# Altium PCB 175-00032, rev1 4-Chan Current Driver.PcbDoc (part 1 of 2)
Units mil, origin at the board's own origin, x right, y up, seen from the top; angles counter-clockwise.
Board outline 3307.09 x 1515.75 mil, 6 copper layers (Top Layer  (*GTL), Mid-Layer 1 (*G1), Internal Plane 1 (*.GP1), InternalPlane2 (*GP2), InternalPlane3 (*.GP3), Bottom Layer  (*GBL)); 61 components, 44 nets, 304 pads, 99 vias.
Unrouted connection lines stored in the file: 1.
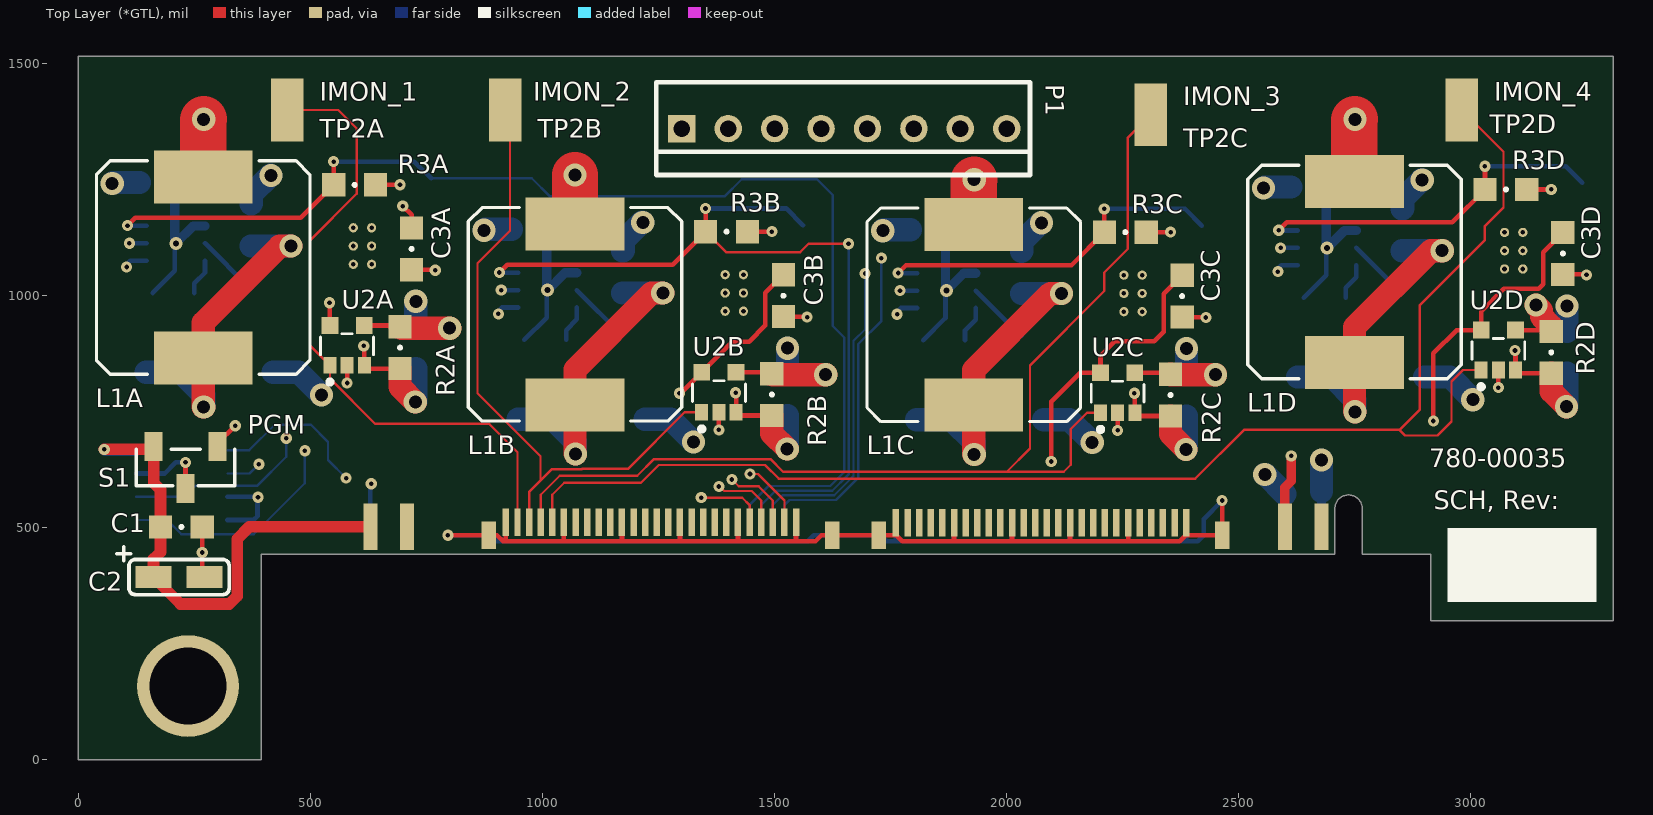
[diagram p0: Top Layer  (*GTL) view]
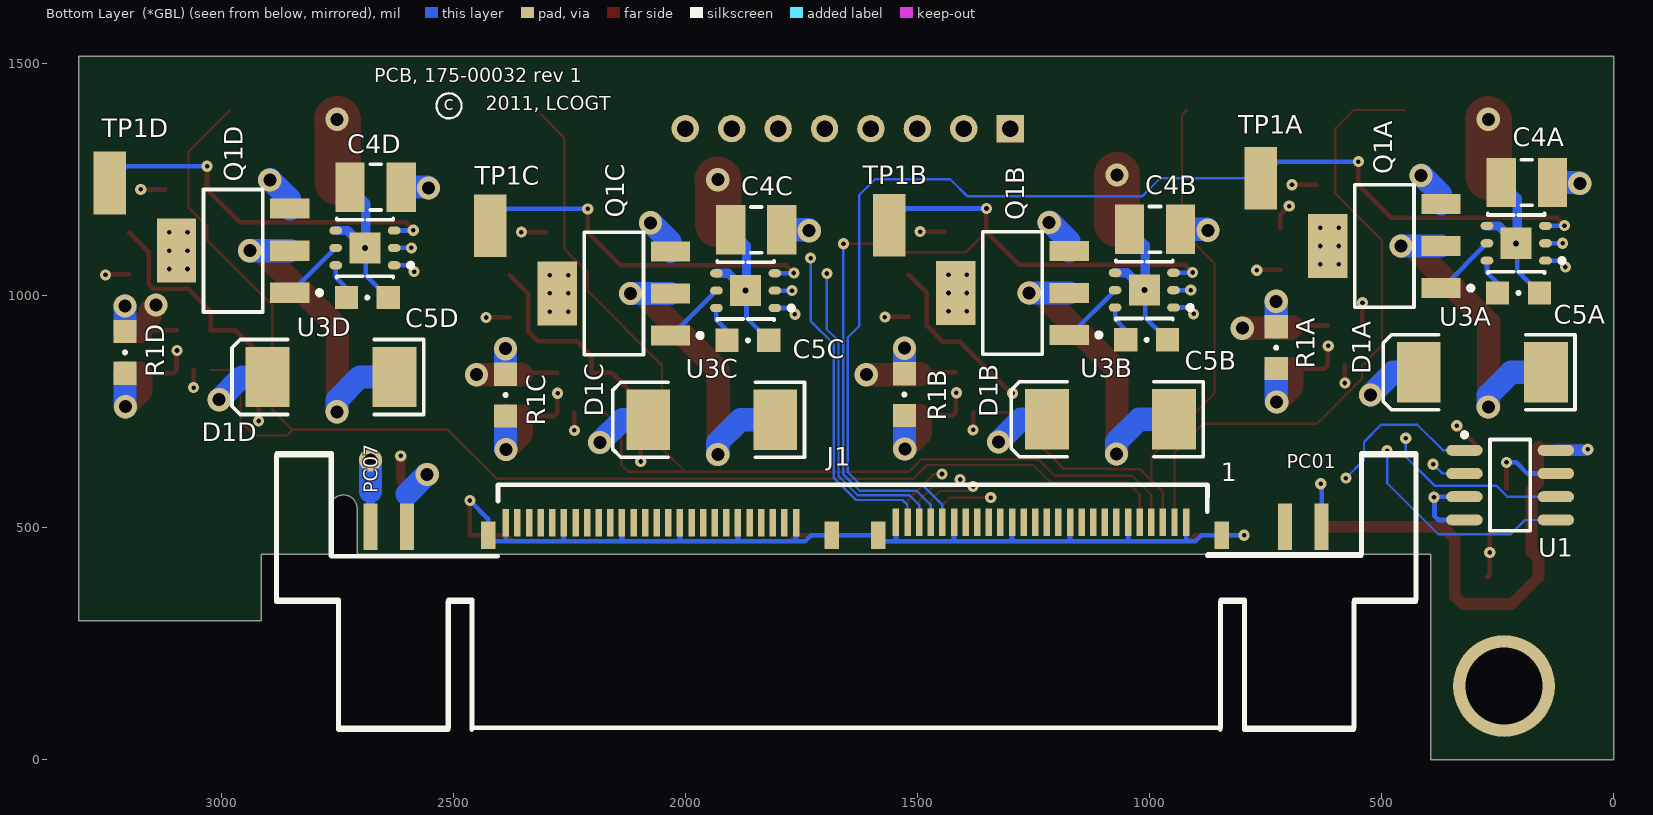
[diagram p1: Bottom Layer  (*GBL) view, seen from below]
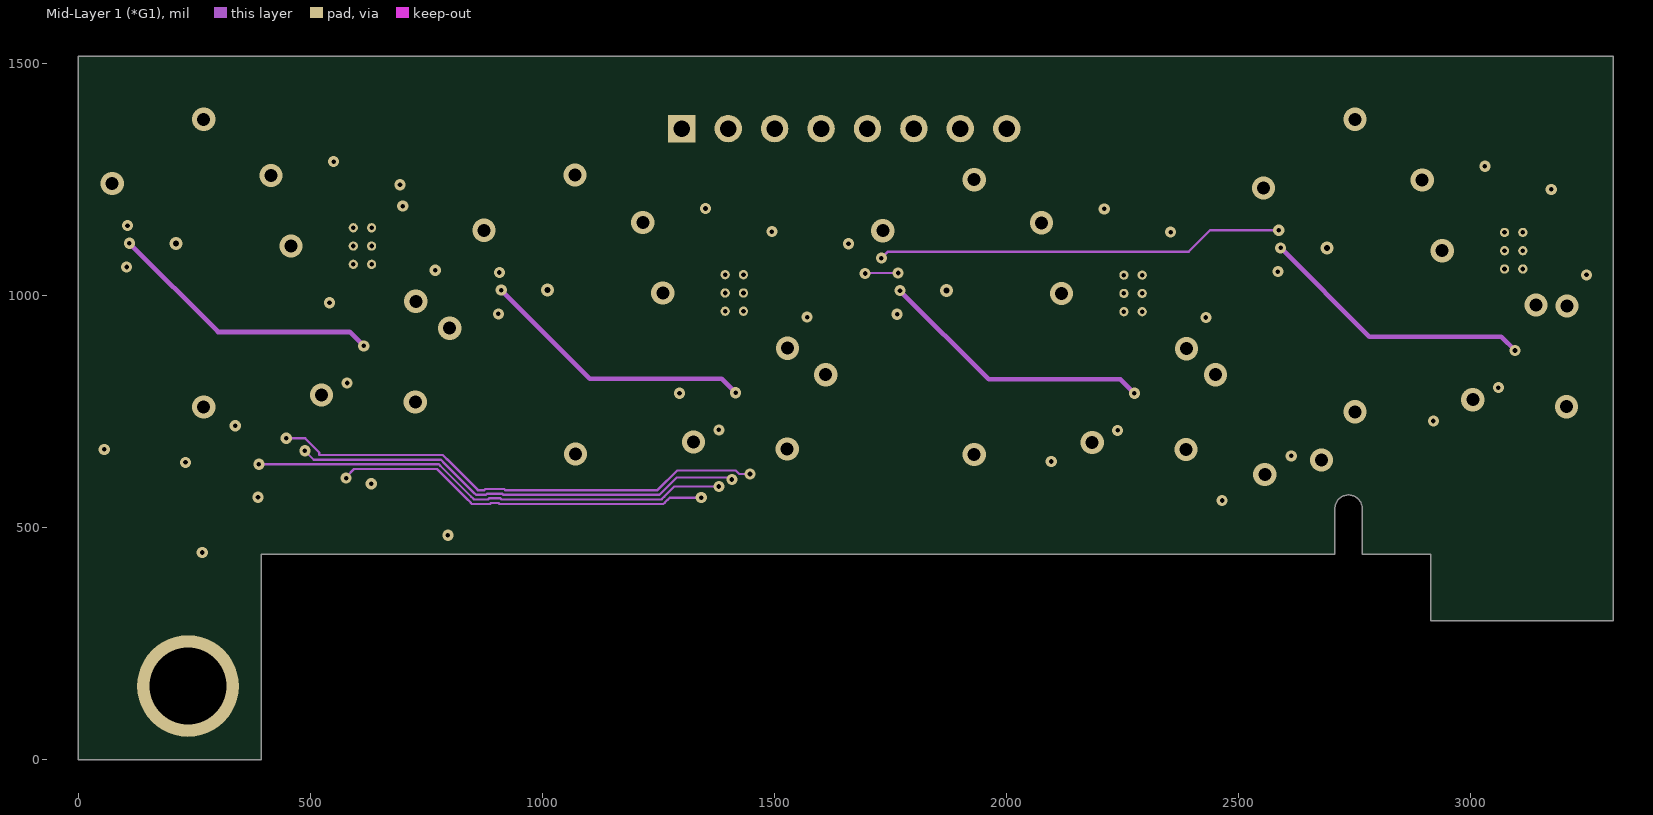
[diagram p2: Mid-Layer 1 (*G1)]
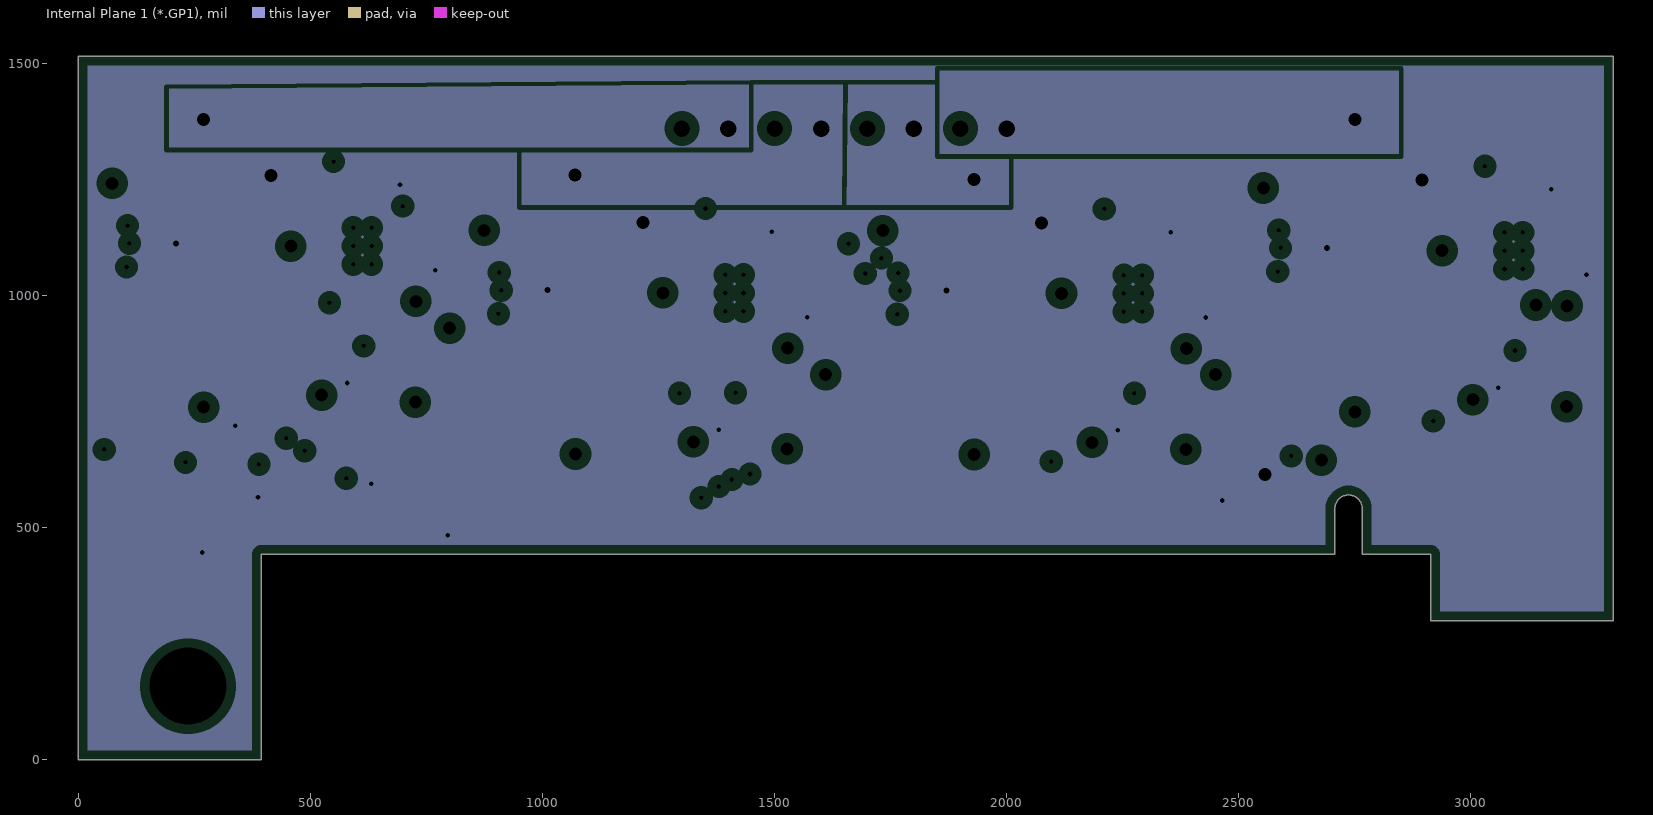
[diagram p3: Internal Plane 1 (*.GP1), clearances drawn from the general rule]
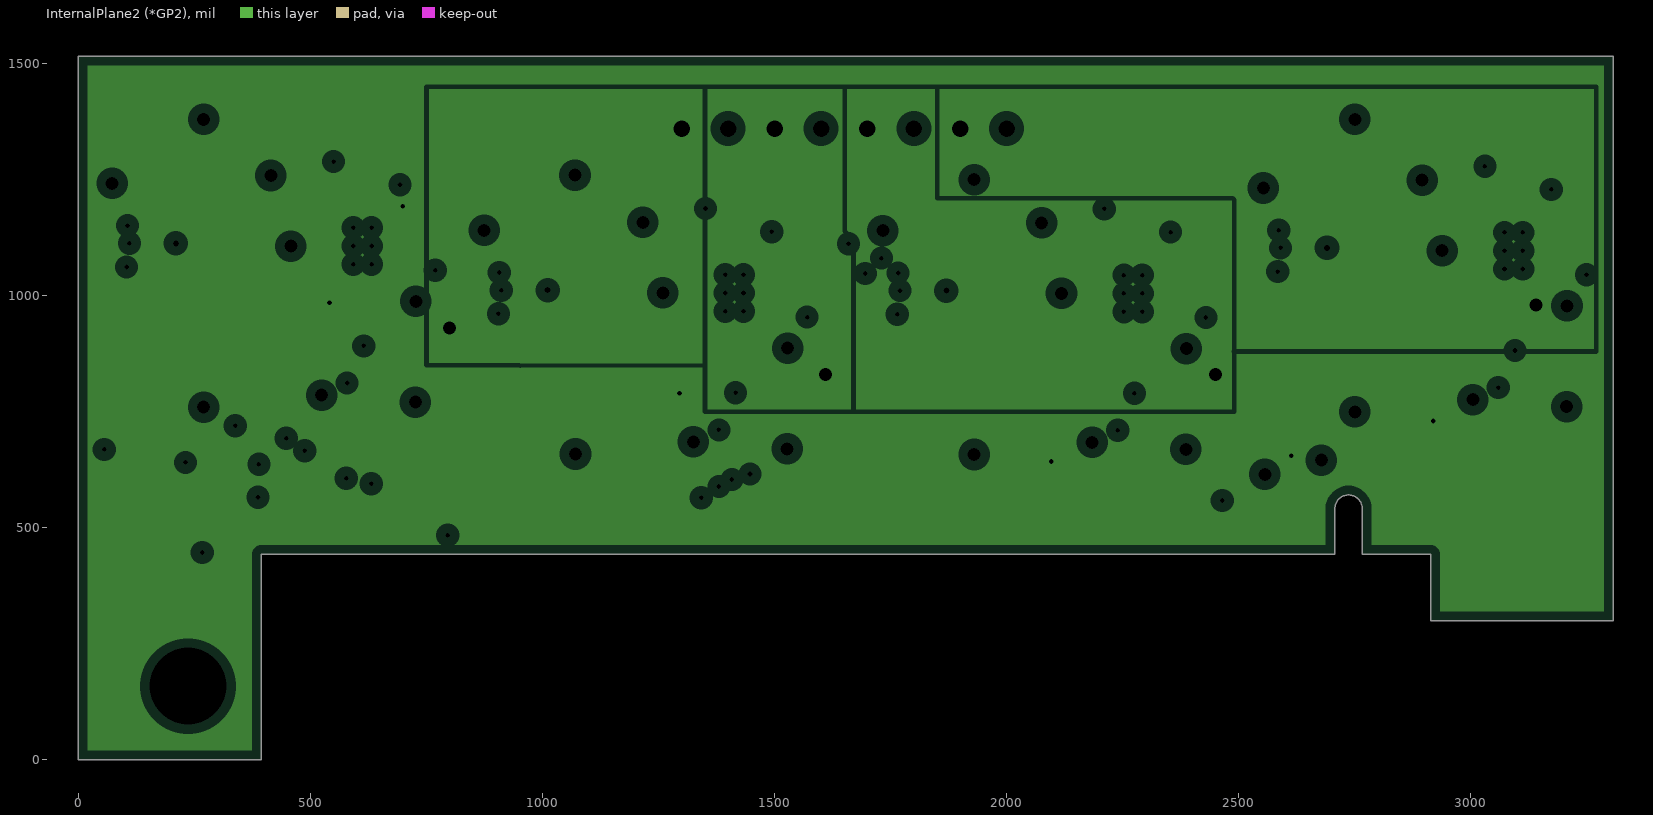
[diagram p4: InternalPlane2 (*GP2), clearances drawn from the general rule]
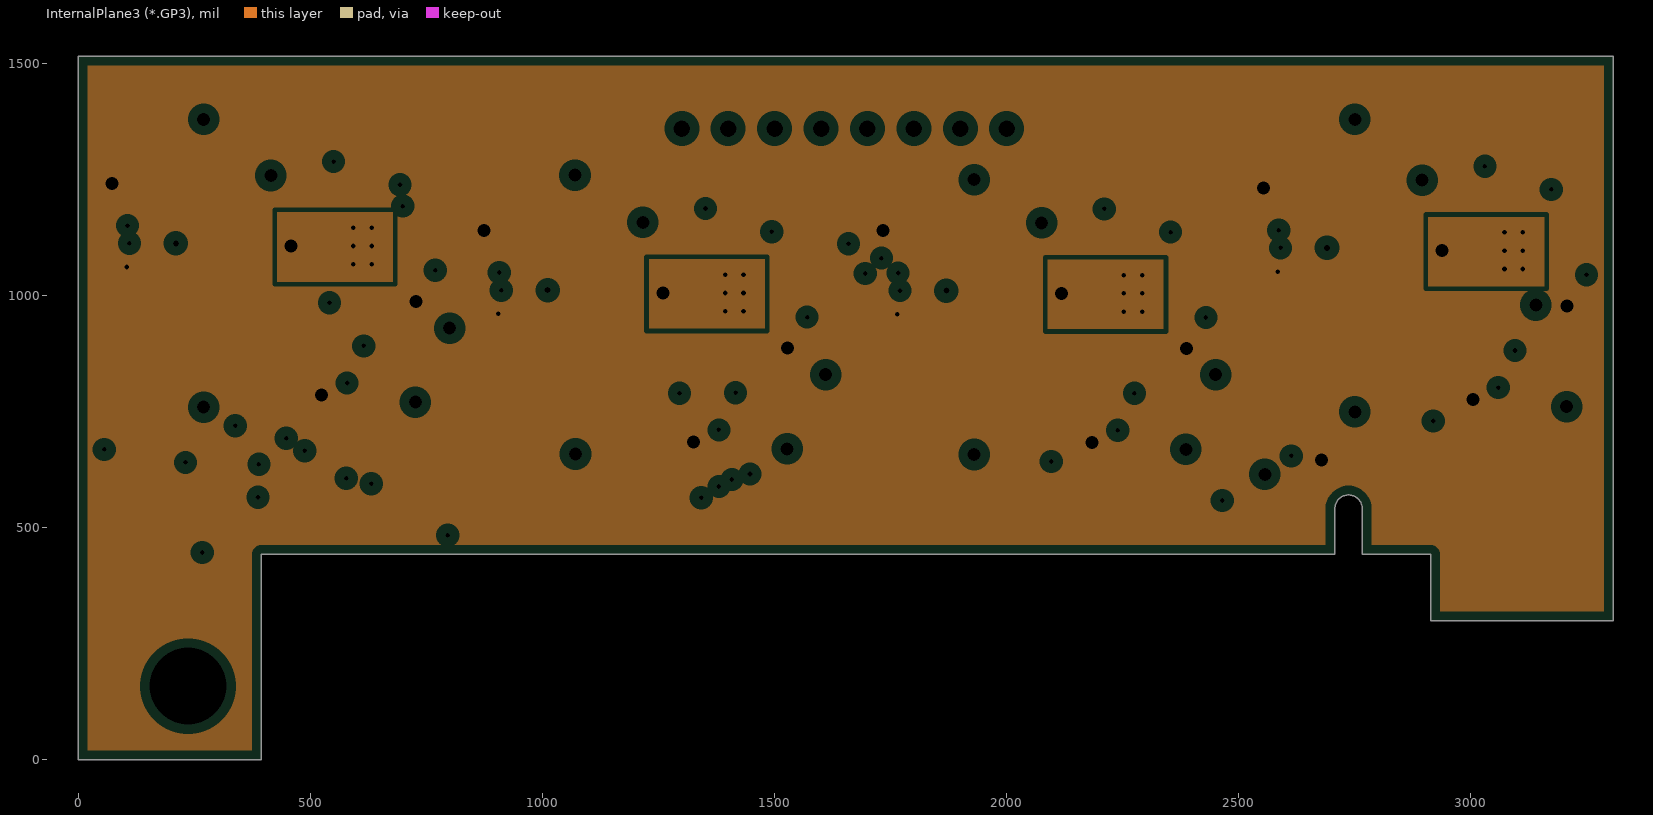
[diagram p5: InternalPlane3 (*.GP3), clearances drawn from the general rule]

## Layer stack, top to bottom
Top Layer  (*GTL): signal copper 1.4
Dielectric: prepreg 12.6, FR-4, Dk 4.8
Mid-Layer 1 (*G1): signal copper 2.8
Dielectric: core 12.6, FR-4, Dk 4.8
Internal Plane 1 (*.GP1): plane copper 2.8, net (Multiple Nets)
Dielectric: prepreg 12.6, FR-4, Dk 4.8
InternalPlane2 (*GP2): plane copper 1.4, net (Multiple Nets)
Dielectric: core 12.6, FR-4, Dk 4.8
InternalPlane3 (*.GP3): plane copper 1.4, net (Multiple Nets)
Dielectric: prepreg 12.6, FR-4, Dk 4.8
Bottom Layer  (*GBL): signal copper 1.4

## Board outline
0,0 0,1515.75 3307.09,1515.75 3307.09,442.91 3307.09,300 2913.39,300 2913.39,442.91 2765.85,442.91 2765.85,541.34 ccw(c2736.32,541.34) 2706.79,541.34 2706.79,442.91 393.7,442.91 393.7,0

## Design rules (kind name [scope] priority, off if disabled: settings)
Clearance [All] p1: gap=5
ComponentClearance ComponentClearance_1 [(InComponent('J1'))] p1: gap=-3937.01 collisioncheckmode=3 verticalgap=-3937.01 showdistances=TRUE
ComponentClearance [All] p2: gap=10 collisioncheckmode=3 verticalgap=10 showdistances=FALSE
HoleSize [All] p1: absolutevalues=TRUE maxlimit=250 minlimit=1 maxpercent=80.000 minpercent=20.000
MinimumSolderMaskSliver [All] p1: minsoldermaskwidth=1
PlaneClearance [All] p1: clearance=20
PlaneConnect PlaneConnect_1 [(InNet('NetD1A_1') OR InNet('NetD1B_1')or(InNet('NetD1c_1') OR InNet('NetD1d_1')) or InNet('I_OUT1')or InNet('I_OUT2')or InNet('I_OUT3')or InNet('I_OUT4') or InNet('I_RTN1')or InNet('I_RTN2')or InNet('I_RTN3')or InNet('I_RTN4'))] p1: planeconnectstyle=Direct reliefexpansion=20 reliefentries=4 reliefconductorwidth=10 reliefairgap=10
PlaneConnect [All] p2: planeconnectstyle=Relief reliefexpansion=20 reliefentries=4 reliefconductorwidth=10 reliefairgap=10
PolygonConnect [All] p1: connectstyle=Relief reliefconductorwidth=10 reliefentries=4 polygonreliefangle="90 Angle"
RoomDefinition I_SOURCE4 [InComponentClass('I_SOURCE4')] p1: confinementstyle=ConfineIn formatcopy=TRUE lockcomponents=FALSE outline 2476,701 3308,701 3308,1510 2476,1510
RoomDefinition I_SOURCE3 [InComponentClass('I_SOURCE3')] p2: confinementstyle=ConfineIn formatcopy=FALSE lockcomponents=FALSE outline 1656,609 2488,609 2488,1500 1656,1500
RoomDefinition I_SOURCE2 [InComponentClass('I_SOURCE2')] p3: confinementstyle=ConfineIn formatcopy=FALSE lockcomponents=FALSE outline 797,610 1629,610 1629,1510 797,1510
RoomDefinition I_SOURCE1 [InComponentClass('I_SOURCE1')] p4: confinementstyle=ConfineIn formatcopy=FALSE lockcomponents=FALSE outline -4,711 828,711 828,1500 -4,1500
RoomDefinition "780-00035, rev1, Pg1, SCH, 4-Chan Current Driver Apps Module" [InComponentClass('780-00035, rev1, Pg1, SCH, 4-Chan Current Driver Apps Module')] p5: confinementstyle=ConfineIn formatcopy=TRUE lockcomponents=FALSE outline -783,-559 4627,-559 4627,2925 -783,2925
RoutingVias [All] p1: holewidth=28 width=50 viastyle="Through Hole" minholewidth=10 minwidth=24 maxholewidth=28 maxwidth=50
SilkToSilkClearance [All] p1: silktosilkclearance=1
SilkscreenOverComponentPads [All] p1: minsilkscreentomaskgap=1
SolderMaskExpansion [All] p1: expansion=4
Width [All] p1: maxlimit=100 minlimit=5 preferedwidth=10
21 further rules are at their usual default settings.

## Classes and differential pairs
component class "780-00035, rev1, Pg1, SCH, 4-Chan Current Driver Apps Module": C1 C2 J1 P1 S1 U1
component class I_SOURCE1: C3A C4A C5A D1A L1A Q1A R1A R2A R3A TP1A TP2A U2_I_SOURCE1 U2A U3A
component class I_SOURCE2: C3B C4B C5B D1B L1B Q1B R1B R2B R3B TP1B TP2B U2_I_SOURCE2 U2B U3B
component class I_SOURCE3: C3C C4C C5C D1C L1C Q1C R1C R2C R3C TP1C TP2C U2_I_SOURCE3 U2C U3C
component class I_SOURCE4: C3D C4D C5D D1D L1D Q1D R1D R2D R3D TP1D TP2D U2_I_SOURCE4 U2D U3D
net class I_OUT[4..1]: I_OUT1 I_OUT2 I_OUT3 I_OUT4
net class I_PWM[4..1]: I_PWM1 I_PWM2 I_PWM3 I_PWM4
net class I_RTN[4..1]: I_RTN1 I_RTN2 I_RTN3 I_RTN4
net class V_IMON[4..1]: V_IMON1 V_IMON2 V_IMON3 V_IMON4
channel class "780-00035, rev1, Pg2, SCH, 4-Chan Current Driver Apps Module": I_SOURCE1 I_SOURCE2 I_SOURCE3 I_SOURCE4

## Components (designator, comment, footprint, x,y, rotation, side; value= is the part's Value field where it differs from the comment)
C1 "Cap SMD" SMD_0805 222,502 r0 top
C2 "16V" SMD_CAP_3216 217,394 r180 top
C3A "Cap SMD" SMD_0805 718,1101 r270 top (schematic designator C3)
C3B "Cap SMD" SMD_0805 1519,1000 r270 top (schematic designator C3)
C3C "Cap SMD" SMD_0805 2378,999 r270 top (schematic designator C3)
C3D "Cap SMD" SMD_0805 3198,1091 r270 top (schematic designator C3)
C4A "10u, 50V" 3225[1210] 187.12,1244 r0 bottom (schematic designator C4)
C4B "10u, 50V" 3225[1210] 988.12,1143 r0 bottom (schematic designator C4)
C4C "10u, 50V" 3225[1210] 1847.12,1142 r0 bottom (schematic designator C4)
C4D "10u, 50V" 3225[1210] 2667.12,1234 r0 bottom (schematic designator C4)
C5A "1u" SMD_0805 205,1006 r180 bottom (schematic designator C5)
C5B "1u" SMD_0805 1006,905 r180 bottom (schematic designator C5)
C5C "1u" SMD_0805 1865,904 r180 bottom (schematic designator C5)
C5D "1u" SMD_0805 2685,996 r180 bottom (schematic designator C5)
D1A "SL43-E3/57T" SMC 283,835 r0 bottom (schematic designator D1)
D1B "SL43-E3/57T" SMC 1084,734 r0 bottom (schematic designator D1)
D1C "SL43-E3/57T" SMC 1943,733 r0 bottom (schematic designator D1)
D1D "SL43-E3/57T" SMC 2763,825 r0 bottom (schematic designator D1)
Designator28 "Comment" "TARGET MECHANICAL 5" -449,-493 r180 bottom
Designator29 "Comment" "TARGET MECHANICAL 5" -622,2057 r180 bottom
Designator30 "Comment" "TARGET MECHANICAL 5" 3763,2107 r180 bottom
J1 "QMSS-EM-PC4-104pin" "QMS EDGE PWR PINS - 104 PIN" 1653.54,442.91 r180 bottom locked
L1A "22uH, 5.3A" "Wurth 7447709680" 269,1061 r90 top (schematic designator L1)
L1B "22uH, 5.3A" "Wurth 7447709680" 1070,960 r90 top (schematic designator L1)
L1C "22uH, 5.3A" "Wurth 7447709680" 1929,959 r90 top (schematic designator L1)
L1D "22uH, 5.3A" "Wurth 7447709680" 2749,1051 r90 top (schematic designator L1)
P1 "Header 8" "HDR1X8 for IDC" 1300,1360 r0 top
Q1A "ZXMN4A06G" "SOT223 ALT w/PowerPAD" 494,1107 r90 bottom (schematic designator Q1)
Q1B "ZXMN4A06G" "SOT223 ALT w/PowerPAD" 1295,1006 r90 bottom (schematic designator Q1)
Q1C "ZXMN4A06G" "SOT223 ALT w/PowerPAD" 2154,1005 r90 bottom (schematic designator Q1)
Q1D "ZXMN4A06G" "SOT223 ALT w/PowerPAD" 2974,1097 r90 bottom (schematic designator Q1)
R1A "Res 0805" SMD_0805 727,888 r270 bottom (schematic designator R1)
R1B "Res 0805" SMD_0805 1528,787 r270 bottom (schematic designator R1)
R1C "Res 0805" SMD_0805 2387,786 r270 bottom (schematic designator R1)
R1D "Res 0805" SMD_0805 3207,878 r270 bottom (schematic designator R1)
R2A "Res 0805" SMD_0805 693,888 r90 top (schematic designator R2)
R2B "Res 0805" SMD_0805 1494,787 r90 top (schematic designator R2)
R2C "Res 0805" SMD_0805 2353,786 r90 top (schematic designator R2)
R2D "Res 0805" SMD_0805 3173,878 r90 top (schematic designator R2)
R3A "100k" SMD_0805 595.38,1238.89 r0 top (schematic designator R3)
R3B "100k" SMD_0805 1396.38,1137.89 r0 top (schematic designator R3)
R3C "100k" SMD_0805 2255.38,1136.89 r0 top (schematic designator R3)
R3D "100k" SMD_0805 3075.38,1228.89 r0 top (schematic designator R3)
S1 "CJS-1200TB" CAS-120A 231,630 r180 top
TP1A "Test Point SMD" "SMD_TEST POINT" 760,1253 r270 bottom (schematic designator TP1)
TP1B "Test Point SMD" "SMD_TEST POINT" 1561,1152 r270 bottom (schematic designator TP1)
TP1C "Test Point SMD" "SMD_TEST POINT" 2420,1151 r270 bottom (schematic designator TP1)
TP1D "Test Point SMD" "SMD_TEST POINT" 3240,1243 r270 bottom (schematic designator TP1)
TP2A "Test Point SMD" "SMD_TEST POINT" 450,1400 r90 top (schematic designator TP2)
TP2B "Test Point SMD" "SMD_TEST POINT" 920,1400 r90 top (schematic designator TP2)
TP2C "Test Point SMD" "SMD_TEST POINT" 2310,1390 r90 top (schematic designator TP2)
TP2D "Test Point SMD" "SMD_TEST POINT" 2980,1400 r90 top (schematic designator TP2)
U1 "M24C32RMN1" SOP8_N 223,592 r180 bottom
U2A "100 V/V" SMD_SOT23_5 579,893 r180 top (schematic designator U2)
U2B "100 V/V" SMD_SOT23_5 1380,792 r180 top (schematic designator U2)
U2C "100 V/V" SMD_SOT23_5 2239,791 r180 top (schematic designator U2)
U2D "100 V/V" SMD_SOT23_5 3059,883 r180 top (schematic designator U2)
U3A "MAX16820" TQFN-6 210,1113 r0 bottom (schematic designator U3)
U3B "MAX16820" TQFN-6 1011,1012 r0 bottom (schematic designator U3)
U3C "MAX16820" TQFN-6 1870,1011 r0 bottom (schematic designator U3)
U3D "MAX16820" TQFN-6 2690,1103 r0 bottom (schematic designator U3)

## Footprints (in the part's own frame and the unit in brackets; to place one, negate y for a bottom-side part, rotate by r counter-clockwise, add the part's x,y. Pads: shape width x height; smd on the part's side, far side on the other; paste and mask are expansions set on the pad)
3225[1210] [mm] "Chip Resistor; Body 3.2 x 2.5 mm (LxW typ)"
  rect 1.6x2.7 smd: 1(-1.4,0) 2(1.4,0)
  silkscreen extent -0.3,-1.25 0.3,1.25
CAS-120A [mm] "Copal Electronics CAS SMD Slide Switch J-Hook"
  rect 1x1.6 smd: 1(-1.75,-1.15) 2(0,1.15) 3(1.75,-1.15)
  silkscreen extent -2.69,-1 2.69,1
"HDR1X8 for IDC" [mm] "Connector; Header; 8 Position"
  rect 1.5x1.5 hole 0.9: 1(0,0)
  round 1.5 hole 0.9: 2(2.54,0) 3(5.08,0) 4(7.62,0) 5(10.16,0) 6(12.7,0) 7(15.24,0) 8(17.78,0)
  silkscreen extent -1.4,-2.54 19.05,2.54
"QMS EDGE PWR PINS - 104 PIN" [mil] "52 pos (104 pin) + 8 pwr pins"
  rect 14x60 smd: 1(732.45,69.15) 3(707.45,69.15) 5(682.45,69.15) 7(657.45,69.15) 9(632.45,69.15) 11(607.45,69.15) 13(582.45,69.15) 15(557.45,69.15) 17(532.45,69.15) 19(507.45,69.15) 21(482.45,69.15) 23(457.45,69.15) 25(432.45,69.15) 27(407.45,69.15) 29(382.45,69.15) 31(357.45,69.15) 33(332.45,69.15) 35(307.45,69.15) 37(282.45,69.15) 39(257.45,69.15) 41(232.45,69.15) 43(207.45,69.15) 45(182.45,69.15) 47(157.45,69.15) 49(132.45,69.15) 51(107.45,69.15) 53(-107.89,68.09) 55(-132.89,68.09) 57(-157.89,68.09) 59(-182.89,68.09) 61(-207.89,68.09) 63(-232.89,68.09) 65(-257.89,68.09) 67(-282.89,68.09) 69(-307.89,68.09) 71(-332.89,68.09) 73(-357.89,68.09) 75(-382.89,68.09) 77(-407.89,68.09) 79(-432.89,68.09) 81(-457.89,68.09) 83(-482.89,68.09) 85(-507.89,68.09) 87(-532.89,68.09) 89(-557.89,68.09) 91(-582.89,68.09) 93(-607.89,68.09) 95(-632.89,68.09) 97(-657.89,68.09) 99(-682.89,68.09) 101(-707.89,68.09) 103(-732.89,68.09)
  rect 14x60 smd far side: 2(732.45,69.15) 4(707.45,69.15) 6(682.45,69.15) 8(657.45,69.15) 10(632.45,69.15) 12(607.45,69.15) 14(582.45,69.15) 16(557.45,69.15) 18(532.45,69.15) 20(507.45,69.15) 22(482.45,69.15) 24(457.45,69.15) 26(432.45,69.15) 28(407.45,69.15) 30(382.45,69.15) 32(357.45,69.15) 34(332.45,69.15) 36(307.45,69.15) 38(282.45,69.15) 40(257.45,69.15) 42(232.45,69.15) 44(207.45,69.15) 46(182.45,69.15) 48(157.45,69.15) 50(132.45,69.15) 52(107.45,69.15) 54(-107.89,68.09) 56(-132.89,68.09) 58(-157.89,68.09) 60(-182.89,68.09) 62(-207.89,68.09) 64(-232.89,68.09) 66(-257.89,68.09) 68(-282.89,68.09) 70(-307.89,68.09) 72(-332.89,68.09) 74(-357.89,68.09) 76(-382.89,68.09) 78(-407.89,68.09) 80(-432.89,68.09) 82(-457.89,68.09) 84(-482.89,68.09) 86(-507.89,68.09) 88(-532.89,68.09) 90(-557.89,68.09) 92(-582.89,68.09) 94(-607.89,68.09) 96(-632.89,68.09) 98(-657.89,68.09) 100(-682.89,68.09) 102(-707.89,68.09) 104(-732.89,68.09)
  rect 31x60 smd: 105(809.45,41.09) 107(69.45,41.09) 109(-30.55,41.09) 111(-770.55,41.09)
  rect 31x60 smd far side: 106(769.45,41.09) 108(29.45,41.09) 110(-70.55,41.09) 112(-810.55,41.09)
  rect 30x100 smd: PC01(1024.45,59.65) PC03(945.55,59.65) PC05(-945.55,59.15) PC07(-1024.45,59.15)
  rect 30x100 smd far side: PC02(1024.45,59.65) PC04(945.55,59.65) PC06(-945.55,59.15) PC08(-1024.45,59.15)
  silkscreen extent -1228,-377 1229,217
SMC [mm] "DO-214-AB/SMC; 2 C-Bend Leads; Body 7.9 x 5.9 mm, inc. leads (LxW)"
  rect 2.4x3.3 smd: 1(-3.475,0) 2(3.475,0)
  silkscreen extent -5.07,-2.05 5.43,2.05
SMD_0805 [mil]
  rect 50x50 smd: 1(-45,0) 2(45,0)
  silkscreen extent -1,-1 1,1
SMD_CAP_3216 [mil]
  rect 78x48 smd: 1(55,0) 2(-55,0)
  silkscreen extent -108,-65 134,38
SMD_SOT23_5 [mil]
  rect 28x36 smd: 1(37,43) 2(0,43) 3(-37,43)
  rect 36x36 smd: 4(-37,-43) 5(37,-43)
  silkscreen extent -57,-25 57,85
"SMD_TEST POINT" [mil] "Keystone 5015"
  rect 135x70 smd: 1(0,0)
SOP8_N [mm] "SOIC, 8-Leads, Body 4.9x3.9mm, Pitch 1.27mm, IPC Medium Density"
  oval 2x0.6 smd: 1(-2.5,1.905) 2(-2.5,0.635) 3(-2.5,-0.635) 4(-2.5,-1.905) 5(2.5,-1.905) 6(2.5,-0.635) 7(2.5,0.635) 8(2.5,1.905)
  silkscreen extent -2.63,-2.5 1.1,2.88, body extent -2,-2.5 2,2.5, height 1.75
"SOT223 ALT w/PowerPAD" [mm] "Like SOT223 except tab conn to 2"
  rect 1.1x2.15 smd: 1(-2.3,-3.1) 2(0,-3.1) 3(2.3,-3.1)
  round 0.508 hole 0.254: 2(-1,2.5) 2(-1,3.5) 2(0,2.5) 2(0,3.5) 2(1,2.5) 2(1,3.5)
  rect 3.5x2.15 smd: 2(0,3.1)
  silkscreen extent -3.35,-4.85 3.35,1.63
"TARGET MECHANICAL 5" [mil]
TQFN-6 [mm]
  oval 0.7x0.45 smd: 1(-1.6,0.95) 2(-1.6,0) 3(-1.6,-0.95) 4(1.6,-0.95) 5(1.6,0) 6(1.6,0.95)
  rect 1.7x1.7 smd: 7(0,0)
  silkscreen extent -2.62,-1.63 1.55,1.63, body extent -1.55,-1.55 1.55,1.55, height 0.8
"Wurth 7447709680" [mm]
  rect 2.9x5.4 smd: 1(-4.95,0) 2(4.95,0)
  silkscreen extent -5.84,-5.84 5.84,5.84

## Part data
C1 C3A C3B C3C C3D: "Capacitor"
C2: library part "Cap Tant 16V", "outline 3.2mm x 1.6mm"
C4A C4B C4C C4D C5A C5B C5C C5D: library part Cap, "Capacitor"
D1A D1B D1C D1D: library part Diode, "Default Diode"
J1: "SAMTEC QMSS EDGE W/PWR PINS"
L1A L1B L1C L1D: library part Inductor, "Inductor"
P1: "Header, 8-Pin"
Q1A Q1B Q1C Q1D: library part ZXMN4AO6G, "N-Chan MOSFET SOT223"
R1A R1B R1C R1D R2A R2B R2C R2D: library part "Res SMD", "Resistor 0805"
R3A R3B R3C R3D: library part RESISTOR_DOUG
S1: library part SW_SPDT_DOUG
TP1A TP1B TP1C TP1D TP2A TP2B TP2C TP2D: "SMD loop test point"
U1: "32 Kbit Serial I²C Bus EEPROM"
U2A U2B U2C U2D: library part INA195, "Current Shunt Monitor"
U3A U3B U3C U3D: "MAX16820, 2MHz High-Brightness LED Driver with High-Side Current Sense and 5000:1 Dimming"

## Free pads (board coordinates)
  round 218.9 hole 166.14: 0(236.22,159.06)

## Via types
v1: diameter 24, hole 10, Top Layer  (*GTL) to Bottom Layer  (*GBL), 57 vias
v2: diameter 50, hole 28, Top Layer  (*GTL) to Bottom Layer  (*GBL), 38 vias
v3: diameter 28, hole 13, Top Layer  (*GTL) to Bottom Layer  (*GBL), 4 vias

## Nets (pads, with @x,y where several pads share a name; then routed paths per layer and width w, separated by ;. In a path a pad name is that pad's centre, name@x,y a point inside that pad or via, vN(x,y) a via of type N, cw(c..) or ccw(c..) an arc to the next point about the centre after c; other vN are vias at no path point)
+3.3V: C1.1 C2.1 J1.PC02 S1.3 U1.8 | length 1103.9
  Top Layer  (*GTL) w25: v1(56,669) 155.83,669 S1.3@162.1,675.28 162.1,596.9 177,582 C1.1@177,502 177,448 162,433 C2.1@162,394 220,336 325,336 342,353 342,476 368.56,502.56 J1.PC02@629.09,502.56
  Bottom Layer  (*GBL) w25: v1(56,669) 58,667 U1.8@124.57,667
+5V: J1.PC04
+12V: C3A.1 C3B.1 C3C.1 C3D.1 J1.PC06 U2A.5 U2B.5 U2C.5 U2D.5 | length 1825.5
  Top Layer  (*GTL) w10: v1(541,985) 542,986 U2A.5@542,936 ; v1(699,1193) 718,1174 C3A.1@718,1146 ; v1(1295,790) 1298,790 U2B.5@1343,835 1409,901 1445,901 1480,936 1480,1006 C3B.1@1519,1045 ; v1(2096,643) 2096,772 2158,834 U2C.5@2202,834 2202,871 2233,902 2318,902 2338,922 2338,1004 C3C.1@2378,1044 ; v1(2919,730) 2919,876 2969,926 U2D.5@3022,926 3022,966 3071,1015 3146,1015 3156,1025 3156,1094 C3D.1@3198,1136
  Top Layer  (*GTL) w20: J1.PC06@2599.09,502.06 2599.09,587.09 2613,601 v1(2613,655)
+24V: C4A.1 C4B.1 C4C.1 C4D.1 D1A.2 D1B.2 D1C.2 D1D.2 J1.PC07 R1A.1 R1B.1 R1C.1 R1D.1 U3A.1 U3B.1 U3C.1 U3D.1 | length 1362.1
  Bottom Layer  (*GBL) w10: v1@107,1059 v1(104,1062) 98,1062 111.6,1075.6 U3A.1@147.01,1075.6 ; v1@908,958 v1(905,961) 899,961 912.6,974.6 U3B.1@948.01,974.6 ; v1@1767,957 v1(1764,960) 1758,960 1771.6,973.6 U3C.1@1807.01,973.6 ; v1@2587,1049 v1(2584,1052) 2578,1052 2591.6,1065.6 U3D.1@2627.01,1065.6
  Bottom Layer  (*GBL) w20: J1.PC07@2677,503.05 J1.PC07@2677.99,502.06 2677.99,579.01
  Bottom Layer  (*GBL) w50: v2(73,1242) 75,1244 C4A.1@132,1244 ; D1A.2@419.81,835 475,835 v2(524,786) ; R1A.1@727,933 v2(727,988) ; v2(874,1141) 876,1143 C4B.1@933,1143 ; D1B.2@1220.81,734 1276,734 v2(1325,685) ; R1B.1@1528,832 v2(1528,887) ; v2(1733,1140) 1735,1142 C4C.1@1792,1142 ; D1C.2@2079.81,733 2135,733 v2(2184,684) ; R1C.1@2387,831 v2(2387,886) ; v2(2553,1232) 2555,1234 C4D.1@2612,1234 ; 2677.99,579.01 v2(2678,646) ; D1D.2@2899.81,825 2955,825 v2(3004,776) ; R1D.1@3207,923 v2(3207,978)
+48V: J1.PC03
-12V: J1.PC08
GND: C1.2 C2.2 C3A.2 C3B.2 C3C.2 C3D.2 C4A.2 C4B.2 C4C.2 C4D.2 C5A.2 C5B.2 C5C.2 C5D.2 J1.1 J1.2 J1.11 J1.12 J1.21 J1.22 J1.31 J1.32 J1.41 J1.42 J1.51 J1.52 J1.53 J1.54 J1.63 J1.64 J1.73 J1.74 J1.83 J1.84 J1.93 J1.94 J1.103 J1.104 J1.105 J1.106 J1.107 J1.108 J1.109 J1.110 J1.111 J1.112 J1.PC01 J1.PC05 Q1A.3 Q1B.3 Q1C.3 Q1D.3 R3A.2 R3B.2 R3C.2 R3D.2 S1.1 U1.3 U1.4 U2A.2 U2B.2 U2C.2 U2D.2 U3A.4 U3A.7 U3B.4 U3B.7 U3C.4 U3C.7 U3D.4 U3D.7 | length 7269.2
  Top Layer  (*GTL) w10: C1.2@267,502 v1(267,447) 267,399 C2.2@272,394 ; S1.1@299.9,675.28 299.9,681.9 v1(338,720) ; v1(579,812) U2A.2@579,850 ; R3A.2@640.38,1238.89 692.89,1238.89 v1(693,1239) ; C3A.2@718,1056 768,1056 v1(769,1055) ; v1(796,484) J1.106@884.09,484 902,484 915,471 925,471 ; J1.2@921.09,512.06 921.09,474.91 925,471 ; 1046.09,471.09 J1.12@1046.09,512.06 ; 1171.09,471.09 J1.22@1171.09,512.06 ; 1296.09,471.09 J1.32@1296.09,512.06 ; v1(1380,711) U2B.2@1380,749 ; 1421.09,473.91 J1.42@1421.09,512.06 ; R3B.2@1441.38,1137.89 1493.89,1137.89 v1(1494,1138) ; C3B.2@1519,955 1569,955 v1(1570,954) ; 1546.09,471.09 J1.52@1546.09,512.06 ; 1886.44,471.57 J1.64@1886.44,511 ; 2011.44,471.44 J1.74@2011.44,511 ; 2136.44,471.44 J1.84@2136.44,511 ; v1(2239,710) U2C.2@2239,748 ; 2261.44,472.44 J1.94@2261.44,511 ; R3C.2@2300.38,1136.89 2352.89,1136.89 v1(2353,1137) ; C3C.2@2378,954 2428,954 v1(2429,953) ; v1(2464.09,558.91) J1.112@2464.09,484 2385.58,484 2372.58,471 1775.29,471 1762.29,484 J1.110@1724.09,484 J1.108@1624.09,484 1601,484 1588,471 925,471 ; v1(3059,802) U2D.2@3059,840 ; R3D.2@3120.38,1228.89 3172.89,1228.89 v1(3173,1229) ; C3D.2@3198,1046 3248,1046 v1(3249,1045)
  Bottom Layer  (*GBL) w10: C5A.2@160,1006 208,1054 208,1111 v3(210,1113) ; U1.4@321.43,517 378,517 386,525 v1@386,567 ; U1.3@321.43,567 v1@386,567 ; v1(387,566) v1@386,567 ; J1.PC01@629.09,502.56 629.09,593.09 v1(631,595) ; v1(796,484) J1.105@844.09,484 888,484 901,471 921,471 ; J1.1@921.09,512.06 921.09,471.09 921,471 ; C5B.2@961,905 1009,953 1009,1010 v3(1011,1012) ; J1.11@1046.09,512.06 1046.09,471 ; J1.21@1171.09,512.06 1171.09,471 ; J1.31@1296.09,512.06 1296.09,471 ; 1421.09,472.09 J1.41@1421.09,512.06 ; J1.51@1546.09,512.06 1546.09,471 ; 1761.44,472.57 J1.53@1761.44,511 ; C5C.2@1820,904 1868,952 1868,1009 v3(1870,1011) ; J1.63@1886.44,511 1886.44,471 ; J1.73@2011.44,511 2011.44,471 ; J1.83@2136.44,511 2136.44,471 ; J1.93@2261.44,511 2261.44,471 ; J1.103@2386.44,511 2386.44,471 ; v1(2464.09,558.91) 2424.09,518.91 J1.111@2424.09,484 2411.09,471 2386.44,471 ; C5D.2@2640,996 2688,1044 2688,1101 v3(2690,1103) ; 921,471 1046.09,471 ; 1046.09,471 1171.09,471 ; 1171.09,471 1296.09,471 ; 1296.09,471 1546.09,471 ; 1546.09,471 1571.09,471 J1.107@1584.09,484 J1.109@1684.09,484 1729,484 1742,471 1886.44,471 ; 1886.44,471 2011.44,471 ; 2011.44,471 2136.44,471 ; 2136.44,471 2261.44,471 ; 2261.44,471 2386.44,471
  Bottom Layer  (*GBL) w20: U3A.7@208,1111 208,1209.76 C4A.2@242.24,1244 ; v3(210,1113) 247.4,1150.4 U3A.4@272.99,1150.4 ; U3B.7@1009,1010 1009,1108.76 C4B.2@1043.24,1143 ; v3(1011,1012) 1048.4,1049.4 U3B.4@1073.99,1049.4 ; U3C.7@1868,1009 1868,1107.76 C4C.2@1902.24,1142 ; v3(1870,1011) 1907.4,1048.4 U3C.4@1932.99,1048.4 ; J1.PC05@2599.09,502.06 2599.09,572.91 ; U3D.7@2688,1101 2688,1199.76 C4D.2@2722.24,1234 ; v3(2690,1103) 2727.4,1140.4 U3D.4@2752.99,1140.4
  Bottom Layer  (*GBL) w50: Q1A.3@371.95,1197.55 373,1198.6 373,1219 414,1260 v2(415,1259) ; Q1B.3@1172.95,1096.55 1174,1097.6 1174,1118 1215,1159 v2(1216,1158) ; Q1C.3@2031.95,1095.55 2033,1096.6 2033,1117 2074,1158 v2(2075,1157) ; v2(2556,615) 2557,615 2599.09,572.91 ; Q1D.3@2851.95,1187.55 2853,1188.6 2853,1209 2894,1250 v2(2895,1249)
I2C_SCL: J1.50 U1.6 | length 1634.6
  Top Layer  (*GTL) w5: v1@1445,609 1438,616 1464.09,616 1521.09,559 J1.50@1521.09,512.06
  Mid-Layer 1 (*G1) w5: v1(448,693) 488.58,693 519.21,662.36 519.21,656.79 785.21,656.79 788.14,653.86 791.07,650.93 794,648 860.79,581.21 874.21,581.21 876.5,583.5 917.5,583.5 919.79,581.21 1247.79,581.21 1290.07,623.5 1416.08,623.5 1423.58,616 1438,616 v1@1445,609
  Bottom Layer  (*GBL) w5: U1.6@124.57,567 229,567 253,591 386,591 448,653 v1(448,693)
  other v1: 1447,616
I2C_SDA: J1.48 U1.5 | length 1624
  Top Layer  (*GTL) w5: v1(1408,604) 1422.5,589.5 1465.59,589.5 1467.05,588.05 1496.09,559 J1.48@1496.09,512.06
  Mid-Layer 1 (*G1) w5: v1(488,666) 507.21,646.79 781.07,646.79 784,643.86 786.93,640.93 853.72,574.14 856.64,571.21 878.35,571.21 880.64,573.5 913.36,573.5 915.65,571.21 1251.93,571.21 1254.86,574.14 1289.22,608.5 1403.5,608.5 v1(1408,604)
  Bottom Layer  (*GBL) w5: U1.5@124.57,517 191,517 222,486 378,486 488,596 v1(488,666)
I_OUT1: P1.1 R2A.2 U2A.4 | length 186.5
  Top Layer  (*GTL) w10: U2A.4@616,936 690,936 R2A.2@693,933
  Top Layer  (*GTL) w50: R2A.2@693,933 696,930 v2(800,930)
I_OUT2: P1.3 R2B.2 U2B.4 | length 195.1
  Top Layer  (*GTL) w10: U2B.4@1417,835 1491,835 R2B.2@1494,832
  Top Layer  (*GTL) w50: R2B.2@1494,832 1496,830 v2(1610,830)
I_OUT3: P1.5 R2C.2 U2C.4 | length 175.7
  Top Layer  (*GTL) w10: U2C.4@2276,834 2350,834 R2C.2@2353,831
  Top Layer  (*GTL) w50: R2C.2@2353,831 2354,830 v2(2450,830)
I_OUT4: P1.7 R2D.2 U2D.4 | length 148.9
  Top Layer  (*GTL) w10: U2D.4@3096,926 3170,926 R2D.2@3173,923
  Top Layer  (*GTL) w50: v2(3140,980) 3152,968 3152,955.22 3173,934.22 R2D.2@3173,923
I_PWM1: J1.43 R3A.1 TP1A.1 U3A.3 | length 2586.1
  Top Layer  (*GTL) w10: v1(106,1151) 123,1168 479.49,1168 R3A.1@550.38,1238.89 550.38,1288.62 v1(550,1289)
  Bottom Layer  (*GBL) w5: TP1A.1@760,1253 977,1253 1016,1214 1392,1214 1429,1251 1591,1251 1625.72,1216.28 1625,1215.57 1625,935 1650,910 1650,620 1620,590 1486.88,590 1446.09,549.21 J1.43@1446.09,512.06
  Bottom Layer  (*GBL) w10: v1(106,1151) 106.6,1150.4 U3A.3@147.01,1150.4 ; v1(550,1289) 724,1289 TP1A.1@760,1253
I_PWM2: J1.45 R3B.1 TP1B.1 U3B.3 | length 1880.7
  Top Layer  (*GTL) w5: R3B.1@1351.38,1137.89 1395.27,1094 1555,1094 1573,1112 v1(1659,1112)
  Top Layer  (*GTL) w10: v1(907,1050) 924,1067 1280.49,1067 R3B.1@1351.38,1137.89 1351.38,1187.62 v1(1351,1188)
  Bottom Layer  (*GBL) w5: J1.45@1471.09,512.06 1471.09,549.21 1501.88,580 1624.14,580 1657.07,612.93 1660,615.86 1660,1111 v1(1659,1112)
  Bottom Layer  (*GBL) w10: v1(907,1050) 907.6,1049.4 U3B.3@948.01,1049.4 ; v1(1351,1188) 1525,1188 TP1B.1@1561,1152
I_PWM3: J1.47 R3C.1 TP1C.1 U3C.3 | length 1552.2
  Top Layer  (*GTL) w10: v1(1766,1049) 1783,1066 2139.49,1066 R3C.1@2210.38,1136.89 2210.38,1186.62 v1(2210,1187)
  Mid-Layer 1 (*G1) w5: v1(1695,1048) 1696,1049 v1(1766,1049)
  Bottom Layer  (*GBL) w5: J1.47@1496.09,512.06 1496.09,549.21 1516.88,570 1628.28,570 1664.14,605.86 1667.07,608.79 1670,611.72 1670,902.93 1695,927.93 v1(1695,1048)
  Bottom Layer  (*GBL) w10: v1(1766,1049) 1766.6,1048.4 U3C.3@1807.01,1048.4 ; v1(2210,1187) 2384,1187 TP1C.1@2420,1151
I_PWM4: J1.49 R3D.1 TP1D.1 U3D.3 | length 2392.4
  Top Layer  (*GTL) w10: v1(2586,1141) 2603,1158 2959.49,1158 R3D.1@3030.38,1228.89 3030.38,1278.62 v1(3030,1279)
  Mid-Layer 1 (*G1) w5: v1(1730,1081) 1744,1095 2392,1095 2438,1141 v1(2586,1141)
  Bottom Layer  (*GBL) w5: J1.49@1521.09,512.06 1521.09,549.21 1531.88,560 1632.43,560 1671.21,598.79 1674.14,601.72 1677.07,604.64 1680,607.57 1680,895.86 1730,945.86 v1(1730,1081)
  Bottom Layer  (*GBL) w10: v1(2586,1141) 2586.6,1140.4 U3D.3@2627.01,1140.4 ; v1(3030,1279) 3204,1279 TP1D.1@3240,1243
I_RTN1: L1A.2 P1.2 | length 124.5
  Top Layer  (*GTL) w100: L1A.2@269,1255.88 269,1379 v2(270,1380)
I_RTN2: L1B.2 P1.4 | length 105.1
  Top Layer  (*GTL) w100: L1B.2@1070,1154.88 v2(1070,1260)
I_RTN3: L1C.2 P1.6 | length 96.5
  Top Layer  (*GTL) w100: L1C.2@1929,1153.88 1929,1249 v2(1930,1250)
I_RTN4: L1D.2 P1.8 | length 134.5
  Top Layer  (*GTL) w100: L1D.2@2749,1245.88 2749,1379 v2(2750,1380)
NetC5A_1: C5A.1 U3A.6 | length 79.1
  Bottom Layer  (*GBL) w10: C5A.1@250,1006 250,1027 272.99,1049.99 U3A.6@272.99,1075.6
NetC5B_1: C5B.1 U3B.6 | length 79.1
  Bottom Layer  (*GBL) w10: C5B.1@1051,905 1051,926 1073.99,948.99 U3B.6@1073.99,974.6
NetC5C_1: C5C.1 U3C.6 | length 79.1
  Bottom Layer  (*GBL) w10: C5C.1@1910,904 1910,925 1932.99,947.99 U3C.6@1932.99,973.6
NetC5D_1: C5D.1 U3D.6 | length 79.1
  Bottom Layer  (*GBL) w10: C5D.1@2730,996 2730,1017 2752.99,1039.99 U3D.6@2752.99,1065.6
NetD1A_1: D1A.1 L1A.1 Q1A.2 | length 695.9
  Top Layer  (*GTL) w50: v2(270,760) 269,761 L1A.1@269,866.12 269,942 434,1107 v2(458,1107)
  Bottom Layer  (*GBL) w50: D1A.1@146.19,835 221,835 270,786 v2(270,760) ; Q1A.2@371.95,1107 v2(458,1107)
NetD1B_1: D1B.1 L1B.1 Q1B.2 | length 695.9
  Top Layer  (*GTL) w50: v2(1071,659) 1070,660 L1B.1@1070,765.12 1070,841 1235,1006 v2(1259,1006)
  Bottom Layer  (*GBL) w50: D1B.1@947.19,734 1022,734 1071,685 v2(1071,659) ; Q1B.2@1172.95,1006 v2(1259,1006)
NetD1C_1: D1C.1 L1C.1 Q1C.2 | length 695.9
  Top Layer  (*GTL) w50: v2(1930,658) 1929,659 L1C.1@1929,764.12 1929,840 2094,1005 v2(2118,1005)
  Bottom Layer  (*GBL) w50: D1C.1@1806.19,733 1881,733 1930,684 v2(1930,658) ; Q1C.2@2031.95,1005 v2(2118,1005)
NetD1D_1: D1D.1 L1D.1 Q1D.2 | length 695.9
  Top Layer  (*GTL) w50: v2(2750,750) 2749,751 L1D.1@2749,856.12 2749,932 2914,1097 v2(2938,1097)
  Bottom Layer  (*GBL) w50: D1D.1@2626.19,825 2701,825 2750,776 v2(2750,750) ; Q1D.2@2851.95,1097 v2(2938,1097)
NetQ1A_1: Q1A.1 U3A.5 | length 139
  Bottom Layer  (*GBL) w10: U3A.5@272.99,1113 369.54,1016.45 Q1A.1@371.95,1016.45
NetQ1B_1: Q1B.1 U3B.5 | length 139
  Bottom Layer  (*GBL) w10: U3B.5@1073.99,1012 1170.54,915.45 Q1B.1@1172.95,915.45
NetQ1C_1: Q1C.1 U3C.5 | length 139
  Bottom Layer  (*GBL) w10: U3C.5@1932.99,1011 2029.54,914.45 Q1C.1@2031.95,914.45
NetQ1D_1: Q1D.1 U3D.5 | length 139
  Bottom Layer  (*GBL) w10: U3D.5@2752.99,1103 2849.54,1006.45 Q1D.1@2851.95,1006.45
NetR1A_2: R1A.2 R2A.1 U2A.3 U3A.2 | length 915.9
  Top Layer  (*GTL) w10: v1(615,892) 616,893 U2A.3@616,850 623,843 R2A.1@693,843
  Top Layer  (*GTL) w50: R2A.1@693,843 693,804 v2(726,771)
  Mid-Layer 1 (*G1) w10: v1(110,1113) 301,922 585,922 v1(615,892)
  Bottom Layer  (*GBL) w10: v1(110,1113) U3A.2@147.01,1113
  Bottom Layer  (*GBL) w50: v2(726,771) 727,772 R1A.2@727,843
NetR1B_2: R1B.2 R2B.1 U2B.3 U3B.2 | length 915.9
  Top Layer  (*GTL) w10: v1(1416,791) 1417,792 U2B.3@1417,749 1424,742 R2B.1@1494,742
  Top Layer  (*GTL) w50: R2B.1@1494,742 1494,703 v2(1527,670)
  Mid-Layer 1 (*G1) w10: v1(911,1012) 1102,821 1386,821 v1(1416,791)
  Bottom Layer  (*GBL) w10: v1(911,1012) U3B.2@948.01,1012
  Bottom Layer  (*GBL) w50: v2(1527,670) 1528,671 R1B.2@1528,742
NetR1C_2: R1C.2 R2C.1 U2C.3 U3C.2 | length 915.9
  Top Layer  (*GTL) w10: v1(2275,790) 2276,791 U2C.3@2276,748 2283,741 R2C.1@2353,741
  Top Layer  (*GTL) w50: R2C.1@2353,741 2353,702 v2(2386,669)
  Mid-Layer 1 (*G1) w10: v1(1770,1011) 1961,820 2245,820 v1(2275,790)
  Bottom Layer  (*GBL) w10: v1(1770,1011) U3C.2@1807.01,1011
  Bottom Layer  (*GBL) w50: v2(2386,669) 2387,670 R1C.2@2387,741